# Altium PCB WRTNode2P_Botton-Board.PcbDoc
Units mil, origin at the board's own origin, x right, y up, seen from the top; angles counter-clockwise.
Board outline 2380 x 2040 mil, 2 copper layers (Top Layer, Bottom Layer); 90 components, 82 nets, 378 pads, 2 vias.
Unrouted connection lines stored in the file: 212.
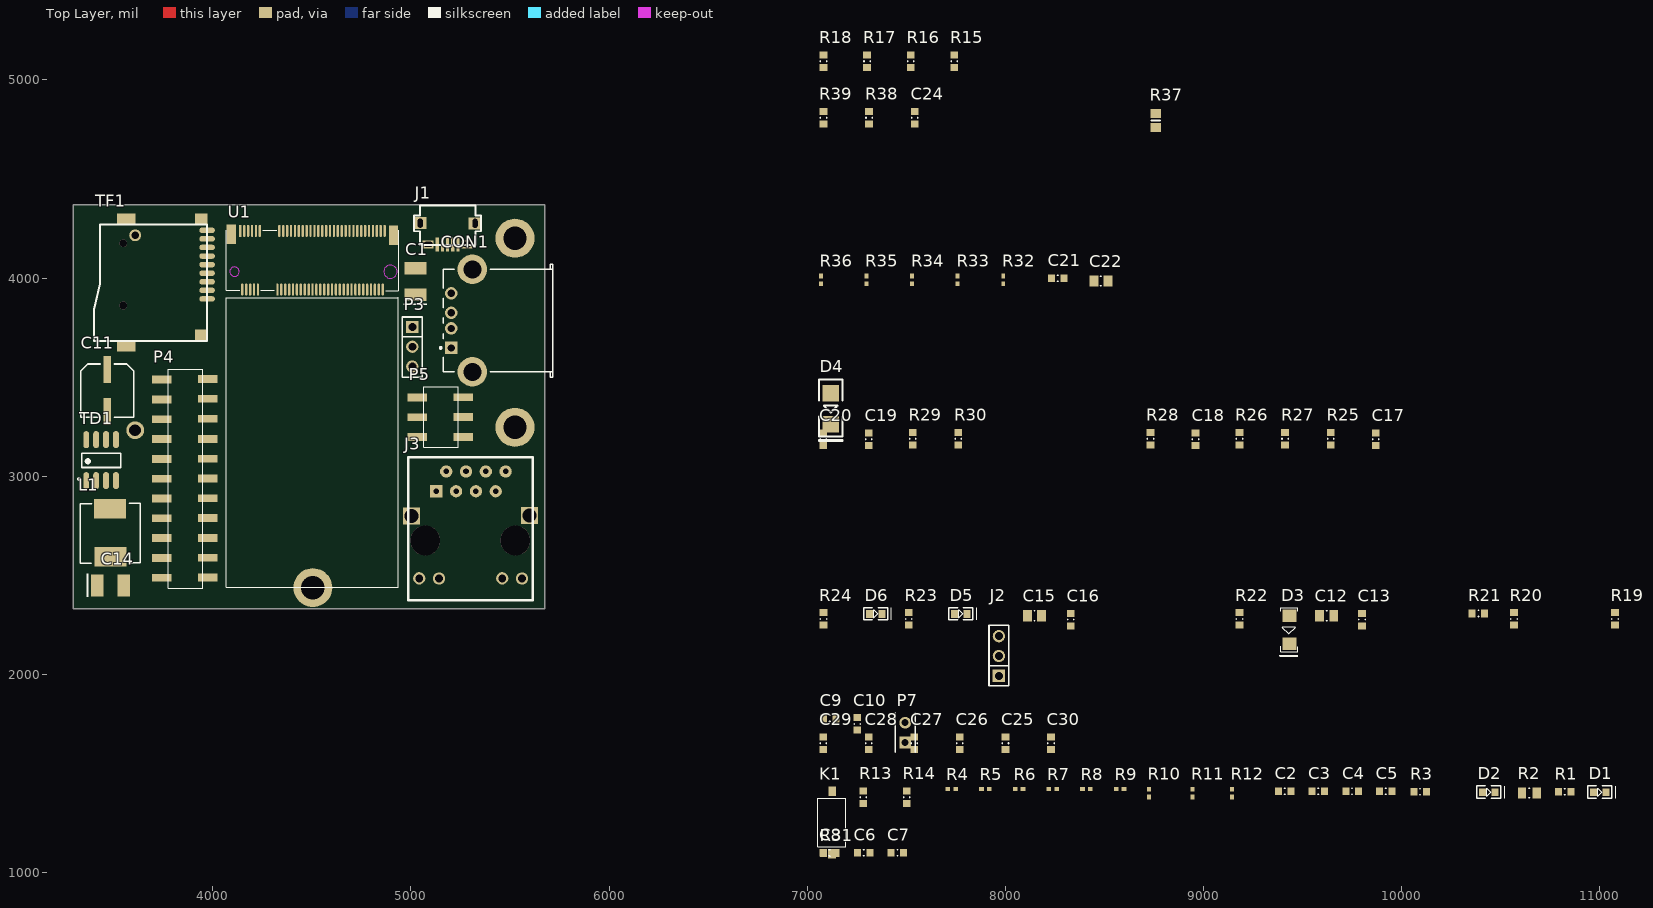
[diagram p0: Top Layer view]
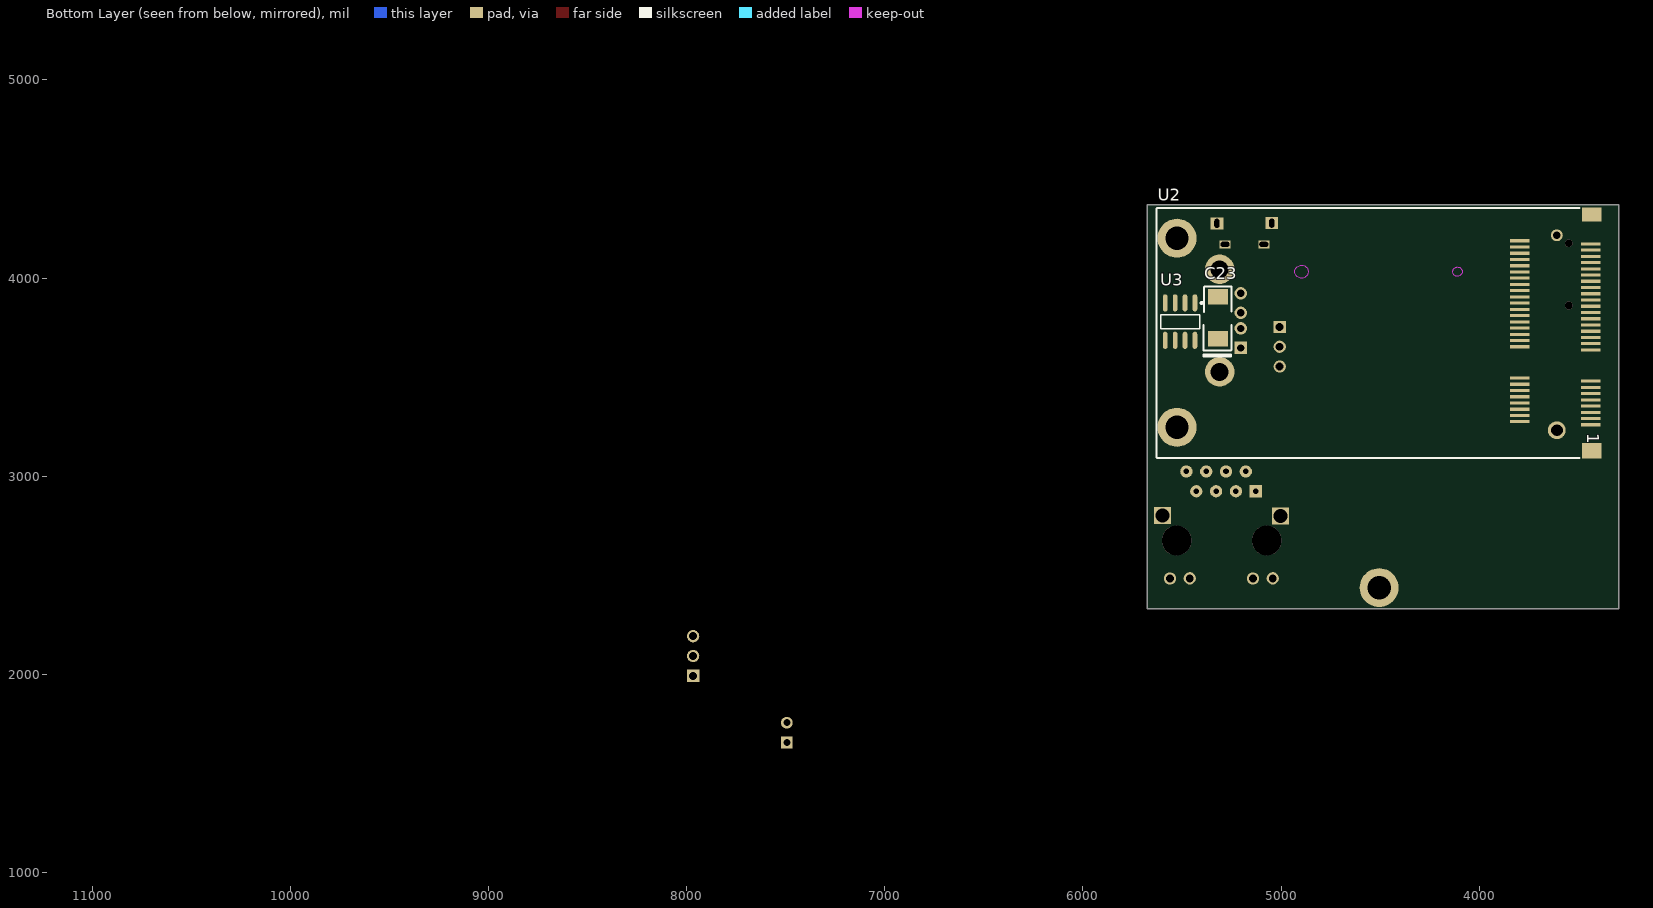
[diagram p1: Bottom Layer view, seen from below]

## Layer stack, top to bottom
Top Solder: solder mask 0.4, Solder Resist, Dk 3.5
Top Layer: signal copper 1.4
Dielectric 1: dielectric 12.6, FR-4, Dk 4.8
Bottom Layer: signal copper 1.4
Bottom Solder: solder mask 0.4, Solder Resist, Dk 3.5

## Board outline
5675,2330 3295,2330 3295,4370 5675,4370

## Design rules (kind name [scope] priority, off if disabled: settings)
Clearance [All] p1: gap=6
PolygonConnect [All] p1: connectstyle=Relief reliefconductorwidth=10 reliefentries=4 polygonreliefangle="90 Angle" airgapwidth=10
RoomDefinition Designator_5 [InComponentClass('Designator')] p1: confinementstyle=ConfineIn formatcopy=TRUE lockcomponents=FALSE outline 0,0 2000,0 2000,1000 0,1000
RoomDefinition Designator_4 [InComponentClass('Designator')] p2: confinementstyle=ConfineIn formatcopy=TRUE lockcomponents=FALSE outline 0,0 2000,0 2000,1000 0,1000
RoomDefinition Designator_3 [InComponentClass('Designator')] p3: confinementstyle=ConfineIn formatcopy=TRUE lockcomponents=FALSE outline 0,0 2000,0 2000,1000 0,1000
RoomDefinition Designator_2 [InComponentClass('Designator')] p4: confinementstyle=ConfineIn formatcopy=TRUE lockcomponents=FALSE outline 0,0 2000,0 2000,1000 0,1000
RoomDefinition Designator_1 [InComponentClass('Designator')] p5: confinementstyle=ConfineIn formatcopy=TRUE lockcomponents=FALSE outline 0,0 2000,0 2000,1000 0,1000
RoomDefinition Designator [InComponentClass('Designator')] p6: confinementstyle=ConfineIn formatcopy=TRUE lockcomponents=FALSE outline 0,0 2000,0 2000,1000 0,1000
RoomDefinition Main [InComponentClass('Main')] p7: confinementstyle=ConfineIn formatcopy=TRUE lockcomponents=FALSE outline 7045,5025 7890,5025 7890,5260 7045,5260
RoutingVias [All] p1: holewidth=28 width=50 viastyle="Through Hole" minholewidth=28 minwidth=50 maxholewidth=28 maxwidth=50
SolderMaskExpansion [All] p1: expansion=4
UnpouredPolygon [All] p1: allowunpoured=FALSE
Width [All] p1: maxlimit=100 minlimit=2 preferedwidth=8
29 further rules are at their usual default settings.

## Classes and differential pairs
component class Main: C25 C26 C27 C28 C29 C30 R15 R16 R17 R18
component class Designator: C23 C24 CON1 R37 R38 R39 U3

## Components (designator, comment, footprint, x,y, rotation, side; value= is the part's Value field where it differs from the comment)
C1 "Cap Pol1" C1210-A 5020,3975 r90 top
C2 "Cap" C0603N 9410,1405 r0 top
C3 "Cap" C0603N 9580,1405 r0 top
C4 "Cap" C0603N 9750,1405 r0 top
C5 "Cap" C0603N 9920,1405 r0 top
C6 "Cap" C0603N 7285,1095 r0 top
C7 "Cap" C0603N 7455,1095 r0 top
C8 "Cap" C0603N 7110,1095 r0 top
C9 "Cap" R0603N 7115,1780 r0 top
C10 "Cap" R0603N 7250,1750 r90 top
C11 "Cap Pol1" 16V220U 3460,3435 r0 top
C12 "Cap" C0805N 9625,2290 r0 top
C13 "Cap" C0603N 9805,2275 r90 top
C14 "Cap Pol1" C1210-A 3475,2450 r0 top
C15 "Cap" C0805N 8150,2290 r0 top
C16 "Cap" C0603N 8335,2275 r90 top
C17 "C0603" C0603N 9875,3185 r90 top
C18 "C0603" C0603N 8965,3185 r90 top
C19 "C0603" C0603N 7315,3185 r90 top
C20 "C0603" C0603N 7085,3185 r90 top
C21 "Cap" c0603n 8265,3995 r0 top
C22 "Cap" c0805n 8485,3980 r0 top
C23 "220uF/16V" C-6032 5315,3795 r270 bottom
C24 "100nF" R0603N 7540,4810 r90 top
C25 "Cap" C0603N 8005,1650 r90 top
C26 "Cap" C0603N 7775,1650 r90 top
C27 "Cap" C0603N 7545,1650 r90 top
C28 "Cap" C0603N 7315,1650 r90 top
C29 "Cap" C0603N 7085,1650 r90 top
C30 "Cap" C0603N 8235,1650 r90 top
CON1 "USB-CON" 1364372 5715,3785 r0 top
D1 "LED0603" LED0603 10995,1405 r0 top
D2 "LED0603" LED0603 10435,1405 r0 top
D3 "4733/05w" ZMM5V1 9430,2225 r90 top
D4 "Diode" DO-02 7110,3335 r90 top
D5 "LED0603" LED0603 7770,2305 r0 top
D6 "LED0603" LED0603 7340,2305 r0 top
J1 "Header 6H" MINIcro-USB-G 5170,4235 r180 top
J2 "Header 3" SIP3-2.54 7965,2085 r90 top
J3 "RJ-45-RH911105A" RJ-45-HR911105A 5305,2705 r180 top
K1 "Header 2" 3*6key 7130,1245 r90 top
L1 "10uH" L7.5*7.5 3480,2715 r90 top
P3 "Header 3" SIP3-2.54 5010,3660 r270 top
P4 "Header 11X2" "SIP2*11-2.54 PATCH" 3845,2805 r90 top
P5 "Header 3X2" "SIP2*3-2.54 PATCH" 5140,3300 r90 top
P7 "Head2" HDR1X2 7495,1655 r90 top
R1 "R0603" R0603n 10825,1410 r0 top
R2 "Res Semi" R0805N 10650,1405 r0 top
R3 "R0603" R0603N 10095,1410 r0 top
R4 "R0603" 0402 7730,1420 r0 top
R5 "R0603" 0402 7900,1420 r0 top
R6 "R0603" 0402 8070,1420 r0 top
R7 "R0603" 0402 8240,1420 r0 top
R8 "R0603" 0402 8410,1420 r0 top
R9 "R0603" 0402 8580,1420 r0 top
R10 "R0603" 0402 8725,1400 r90 top
R11 "R0603" 0402 8945,1400 r90 top
R12 "R0603" 0402 9145,1400 r90 top
R13 "Res Semi" R0603N 7280,1380 r90 top
R14 "Res Semi" R0603N 7500,1380 r90 top
R15 "Res Semi" r0603n 7740,5095 r90 top
R16 "Res Semi" r0603n 7520,5095 r90 top
R17 "Res Semi" r0603n 7300,5095 r90 top
R18 "Res Semi" r0603n 7080,5095 r90 top
R19 "Res Semi" R0603N 11075,2280 r90 top
R20 "Res Semi" R0603N 10565,2280 r90 top
R21 "Res Semi" R0603N 10390,2310 r0 top
R22 "Res Semi" R0603N 9180,2280 r90 top
R23 "R0603" R0603N 7510,2280 r90 top
R24 "R0603" R0603N 7080,2280 r90 top
R25 "R0603" R0603N 9640,3190 r90 top
R26 "R0603" R0603N 9180,3190 r90 top
R27 "R0603" R0603N 9410,3190 r90 top
R28 "R0603" R0603N 8730,3190 r90 top
R29 "R0603" R0603N 7530,3190 r90 top
R30 "R0603" R0603N 7760,3190 r90 top
R31 "Res Semi" R0603N 7115,1100 r0 top
R32 "Res Semi" 0402 7990,3990 r90 top
R33 "Res Semi" 0402 7760,3990 r90 top
R34 "Res Semi" 0402 7530,3990 r90 top
R35 "Res Semi" 0402 7300,3990 r90 top
R36 "Res Semi" 0402 7070,3990 r90 top
R37 "Res Semi" 6-0805_N 8760,4795 r90 top
R38 "10K" R0603N 7310,4810 r90 top
R39 "10K" R0603N 7080,4810 r90 top
TD1 "TD1410" SOP8 3420,3080 r0 top
TF1 "TF_CARD" TFP09-2-12B 3785,3990 r270 top
U1 "core" "NGFF M.2" 4490,3210 r0 top
U2 "PCI-E MINI CARD CONNECTOR" MINIPCIE 4245,3755 r180 bottom
U3 "MIC2025-1" SO8_N 5510,3780 r270 bottom

## Footprints (in the part's own frame and the unit in brackets; to place one, negate y for a bottom-side part, rotate by r counter-clockwise, add the part's x,y. Pads: shape width x height; smd on the part's side, far side on the other; paste and mask are expansions set on the pad)
3*6key [mil]
  rect 47.24x39.37 smd: 1(-151,4) 2(164,3)
  silkscreen extent -115,-65 129,77, body extent -113,-50 128,66, height 50
6-0805_N [mm] "Chip Resistor, Body 2.0x1.2mm, IPC Medium Density"
  rect 1.2x1.4 smd: 1(-0.9,0) 2(0.9,0)
  silkscreen extent 0,-0.6 0,0.6, body extent -1.07,-0.7 1.07,0.7, height 0.7
16V220U [mm]
  rect 1x3.5 smd: 1(0.178,2.624) 2(0.178,-2.776)
  silkscreen extent -3.22,-3.48 3.58,3.32, body extent -2.95,-3.22 3.33,3.07, height 6.1
0402 [mm] "Chip Capacitor, Body 1.0x0.5mm, IPC High Density"
  rect 0.6x0.5 smd: 1(-0.5,0) 2(0.5,0)
  body extent -0.55,-0.3 0.55,0.3, height 1.3
1364372 [mm] "Connector; USB1.1, Type A, Thru-Hole; 4 Position; Right Angle"
  rect 1.6x1.6 hole 0.92: 1(-12.99,-3.5)
  round 1.6 hole 0.92: 2(-12.99,-1) 3(-12.99,1) 4(-12.99,3.5)
  round 3.8 hole 2.3: 5(-10.28,6.57) 6(-10.28,-6.57)
  silkscreen extent -14.46,-7.25 0,7.25
C0603N [mm]
  rect 0.9x1 smd: 1(-0.775,0.102) 2(0.825,0.102)
  silkscreen extent -0.02,-0.3 0.08,0.5, body extent -0.85,-0.37 0.9,0.58, height 0.55
c0603n [mm]
  rect 0.9x1 smd: 1(-0.775,0.102) 2(0.825,0.102)
  silkscreen extent -0.02,-0.3 0.08,0.5, body extent -0.85,-0.37 0.9,0.58, height 0.55
C0805N [mm]
  rect 1.15x1.45 smd: 1(-0.951,0.127) 2(0.849,0.127)
  silkscreen extent -0.1,-0.5 0,0.75, body extent -1.15,-0.6 1.05,0.85, height 0.75
c0805n [mm]
  rect 1.15x1.45 smd: 1(-0.951,0.127) 2(0.849,0.127)
  silkscreen extent -0.1,-0.5 0,0.75, body extent -1.15,-0.6 1.05,0.85, height 0.75
C1210-A [mm]
  rect 1.6x2.8 smd: 1(-1.486,-0.076) 2(1.914,-0.076)
  silkscreen extent -2.74,-1.52 -2.64,1.42, body extent -1.91,-0.97 2.3,0.83, height 0.75
C-6032 [mm]
  rect 2x2.55 smd: 1(2.598,-0.096) 2(-2.802,-0.096)
  silkscreen extent -4.14,-1.96 4.85,1.63, body extent -2.41,-1.4 2.34,1.22, height 2.1
DO-02 [mm]
  rect 2.1x2.1 smd: 1(2.118,-0.229) 2(-1.882,-0.229)
  silkscreen extent -4.04,-1.75 3.89,1.3, body extent -2.5,-1.63 2.7,1.27, height 2.1
HDR1X2 [mm] "Connector; Header; 2 Position"
  rect 1.5x1.5 hole 0.9: 1(0,0)
  round 1.5 hole 0.9: 2(2.54,0)
  silkscreen extent -1.27,-1.27 3.81,1.27
L7.5*7.5 [mil]
  rect 98.43x161.42 smd: 1(119,-1) 2(-121,-4)
  silkscreen extent -156,-154 149,149, body extent -156,-159 152,150, height 197
LED0603 [mm]
  rect 0.9x1 smd: 1(-0.648,-0.025) 2(0.952,-0.025)
  silkscreen extent -1.4,-0.79 2.18,0.79, body extent -0.72,-0.5 1.03,0.45, height 1.1
MINIcro-USB-G [mil]
  rect 16x70 smd: 1(-67,65) 2(-41,65) 3(-15,65) 4(11,65) 5(37,65)
  rect 55x40 hole 25 slot 45 at 0 deg unplated: 6(83,65) 7(-113,65)
  rect 65x61 hole 25 slot 45 at 90 deg unplated: 8(123,-42) 9(-154,-41)
  silkscreen extent -185,-131 155,69
MINIPCIE [mm]
  round 2.286 hole 1.524 unplated: 0(16.177,-13.298)
  round 1.524 hole 0.991 unplated: 0(16.177,11.702)
  rect 2.5x0.4 smd: 1(20.527,-12.598) 2(11.427,-12.198) 3(20.527,-11.798) 4(11.427,-11.398) 5(20.527,-10.998) 6(11.427,-10.598) 7(20.527,-10.198) 8(11.427,-9.798) 9(20.527,-9.398) 10(11.427,-8.998) 11(20.527,-8.598) 12(11.427,-8.198) 13(20.527,-7.798) 14(11.427,-7.398) 15(20.527,-6.998) 16(11.427,-6.598) 17(20.527,-2.998) 18(11.427,-2.598) 19(20.527,-2.198) 20(11.427,-1.798) 21(20.527,-1.398) 22(11.427,-0.998) 23(20.527,-0.598) 24(11.427,-0.198) 25(20.527,0.202) 26(11.427,0.602) 27(20.527,1.002) 28(11.427,1.402) 29(20.527,1.802) 30(11.427,2.202) 31(20.527,2.602) 32(11.427,3.002) 33(20.527,3.402) 34(11.427,3.802) 35(20.527,4.202) 36(11.427,4.602) 37(20.527,5.002) 38(11.427,5.402) 39(20.527,5.802) 40(11.427,6.202) 41(20.527,6.602) 42(11.427,7.002) 43(20.527,7.402) 44(11.427,7.802) 45(20.527,8.202) 46(11.427,8.602) 47(20.527,9.002) 48(11.427,9.402) 49(20.527,9.802) 50(11.427,10.202) 51(20.527,10.602) 52(11.427,11.002)
  round 5 hole 3: 53(-32.523,11.322) 54(-32.523,-12.914)
  rect 2.5x1.8 smd: 55(20.677,14.352)
  rect 2.5x2 smd: 56(20.677,-15.948)
  silkscreen extent -35.13,-16.83 19.09,15.17
"NGFF M.2" [mm]
  rect 1.2x2.5 smd: 0(-10.058,25.654) 0(10.719,25.552)
  round 5 hole 3: 0(0.381,-19.634)
  rect 0.3x1.55 smd: 1(-8.915,26.111)
  oval 0.3x1.55 smd: 2(-8.661,18.587) 3(-8.415,26.111) 4(-8.161,18.587) 5(-7.915,26.111) 6(-7.661,18.587) 7(-7.415,26.111) 8(-7.161,18.587) 9(-6.915,26.111) 10(-6.661,18.587) 11(-6.415,26.111) 20(-4.161,18.587) 21(-3.915,26.111) 22(-3.661,18.587) 23(-3.415,26.111) 24(-3.161,18.587) 25(-2.915,26.111) 26(-2.661,18.587) 27(-2.415,26.111) 28(-2.161,18.587) 29(-1.915,26.111) 30(-1.661,18.587) 31(-1.415,26.111) 32(-1.161,18.587) 33(-0.915,26.111) 34(-0.661,18.587) 35(-0.415,26.111) 36(-0.161,18.587) 37(0.085,26.111) 38(0.339,18.587) 39(0.585,26.111) 40(0.839,18.587) 41(1.085,26.111) 42(1.339,18.587) 43(1.585,26.111) 44(1.839,18.587) 45(2.085,26.111) 46(2.339,18.587) 47(2.585,26.111) 48(2.839,18.587) 49(3.085,26.111) 50(3.339,18.587) 51(3.585,26.111) 52(3.839,18.587) 53(4.085,26.111) 54(4.339,18.587) 55(4.585,26.111) 56(4.839,18.587) 57(5.085,26.111) 58(5.339,18.587) 59(5.585,26.111) 60(5.839,18.587) 61(6.085,26.111) 62(6.339,18.587) 63(6.585,26.111) 64(6.839,18.587) 65(7.085,26.111) 66(7.339,18.587) 67(7.585,26.111) 68(7.839,18.587) 69(8.085,26.111) 70(8.339,18.587) 71(8.585,26.111) 72(8.839,18.587) 73(9.085,26.111) 74(9.339,18.587) 75(9.585,26.111)
  Keep-Out Layer circle w0.127: c-9.668,20.879 r0.6
  Keep-Out Layer circle w0.127: c10.334,20.879 r0.85
  silkscreen extent -10.74,-19.61 11.38,26.22
R0603N [mm]
  rect 0.9x1 smd: 1(-0.825,-0.076) 2(0.775,-0.076)
  silkscreen extent -0.08,-0.48 0.02,0.32, body extent -0.87,-0.55 0.82,0.4, height 0.6
R0603n [mm]
  rect 0.9x1 smd: 1(-0.825,-0.076) 2(0.775,-0.076)
  silkscreen extent -0.08,-0.48 0.02,0.32, body extent -0.87,-0.55 0.82,0.4, height 0.6
r0603n [mm]
  rect 0.9x1 smd: 1(-0.825,-0.076) 2(0.775,-0.076)
  silkscreen extent -0.08,-0.48 0.02,0.32, body extent -0.87,-0.55 0.82,0.4, height 0.6
R0805N [mm]
  rect 1.05x1.4 smd: 1(-1.052,-0.102) 2(0.848,-0.102)
  silkscreen extent -0.15,-0.7 -0.05,0.5, body extent -1.2,-0.78 1,0.57, height 0.7
RJ-45-HR911105A [mil]
  rect 86.61x86.61 hole 70.87: 0(-293,-96) 0(302,-94)
  round 149.61 hole 149.61: 0(-222,30) 0(233,30)
  rect 62x62 hole 28: 1(176.89,-218.37)
  round 62 hole 28: 2(126.89,-318.37) 3(76.89,-218.37) 4(26.89,-318.37) 5(-23.11,-218.37) 6(-73.11,-318.37) 7(-123.11,-218.37) 8(-173.11,-318.37)
  round 62 hole 40: 9(263,221) 10(163,222) 11(-156,221) 12(-256,222)
  silkscreen extent -310,-391 319,332, body extent -302,-387 304,349, height 550
"SIP2*3-2.54 PATCH" [mm]
  rect 1x2.5 smd: 1(-2.591,-3.145) 2(-2.616,2.718) 3(-0.051,-3.145) 4(-0.076,2.718) 5(2.489,-3.145) 6(2.464,2.718)
  silkscreen extent -3.94,-2.49 3.81,1.88, body extent -3.94,-2.54 3.81,1.91, height 8.3
"SIP2*11-2.54 PATCH" [mm]
  rect 1x2.5 smd: 1(-8.052,-3.272) 2(-8.077,2.591) 3(-5.512,-3.272) 4(-5.537,2.591) 5(-2.972,-3.272) 6(-2.997,2.591) 7(-0.432,-3.272) 8(-0.457,2.591) 9(2.108,-3.272) 10(2.083,2.591) 11(4.648,-3.272) 12(4.623,2.591) 13(7.188,-3.272) 14(7.163,2.591) 15(9.728,-3.272) 16(9.703,2.591) 17(12.319,-3.272) 18(12.243,2.591) 19(14.859,-3.272) 20(14.783,2.591) 21(17.399,-3.272) 22(17.323,2.591)
  silkscreen extent -9.4,-2.62 18.67,1.75, body extent -9.4,-2.69 18.67,1.73, height 8.3
SIP3-2.54 [mil]
  rect 62x62 hole 40: 1(-93,-3)
  round 62 hole 40: 2(7,-3) 3(107,-3)
  silkscreen extent -143,-53 162,47
SO8_N [mm] "SOIC, 8-Leads, Body 4.9x3.9mm, Pitch 1.27mm, IPC Medium Density"
  oval 2.2x0.6 smd: 1(-2.4,1.905) 2(-2.4,0.635) 3(-2.4,-0.635) 4(-2.4,-1.905) 5(2.4,-1.905) 6(2.4,-0.635) 7(2.4,0.635) 8(2.4,1.905)
  silkscreen extent -2.52,-2.5 0.9,2.88, body extent -2,-2.5 2,2.5, height 1.75
SOP8 [mil]
  oval 29.53x86.61 smd: 1(-59,-103) 2(-9,-103) 3(41,-103) 4(91,-103) 5(91,104) 6(41,104) 7(-9,104) 8(-59,104)
  silkscreen extent -100,-100 114,36, body extent -82,-79 114,79, height 69
TFP09-2-12B [mm]
  oval 0.7x2 smd: 1(2.429,4.724) 2(1.329,4.724) 3(0.229,4.724) 4(-0.871,4.724) 5(-1.971,4.724) 6(-3.071,4.724) 7(-4.171,4.724) 8(-5.271,4.724) 9(-6.371,4.724)
  rect 1.4x1.6 smd: 10(7.079,3.97) 11(-7.825,3.97)
  rect 1.4x2.4 smd: 12(8.487,-5.63) 13(-7.825,-5.63)
  silkscreen extent -7.14,-9.75 7.85,4.72
ZMM5V1 [mil]
  rect 62.99x70.87 smd: 1(69,-5) 2(-71,-4)
  silkscreen extent -135,-48 111,44, body extent -84,-40 81,31, height 30

## Part data
C1 C11 C14: "Polarized Capacitor (Radial)"
C2 C3 C4 C5 C6 C7 C8 C9 C10 C12 C13 C15 C16 C21 C22 C25 C26 C27 C28 C29 C30: "Capacitor"
C17 C18 C19 C20: library part "Cap Semi", "Capacitor (Semiconductor SIM Model)"
C23: library part "Cap Pol1", "Polarized Capacitor (Radial)"
C24: library part CAP
D1 D2 D5 D6: library part LED, "LED"
D3: library part Diode, "Default Diode"
D4: "Default Diode"
J1: "Header, 6-Pin, Right Angle"
J2 P3: "Header, 3-Pin"
K1: "Header, 2-Pin"
L1: library part Inductor, "Inductor"
P4: "Header, 11-Pin, Dual row"
P5: "Header, 3-Pin, Dual row"
R1 R3 R4 R5 R6 R7 R8 R9 R10 R11 R12 R23 R24 R25 R26 R27 R28 R29 R30: library part "Res Semi", "Semiconductor Resistor"
R2 R13 R14 R15 R16 R17 R18 R19 R20 R21 R22 R31 R32 R33 R34 R35 R36 R37: "Semiconductor Resistor"
R38 R39: library part RES

## Via types
v1: diameter 39.37, hole 39.37, Top Layer to Bottom Layer, 2 vias

## Nets (pads, with @x,y where several pads share a name; then routed paths per layer and width w, separated by ;. In a path a pad name is that pad's centre, name@x,y a point inside that pad or via, vN(x,y) a via of type N, cw(c..) or ccw(c..) an arc to the next point about the centre after c; other vN are vias at no path point)
+1.5V: C8.2 C9.2 C10.2 P7.1 U2.6 U2.28 U2.48
C_5V: C23.1 C24.2 CON1.1 R37.2 U3.6 U3.8
D0: R35.2 TF1.7 U1.35
D1: R36.2 TF1.8 U1.37
D2: R32.2 TF1.1 U1.31
D3: R33.2 TF1.2 U1.29
DGND: C6.1 C7.1 C8.1 C9.1 C10.1 C11.2 C12.1 C13.1 C14.2 C15.1 C16.1 C17.2 C18.2 C19.1 C20.1 C21.2 C22.2 C23.2 C24.1 CON1.4 D3.1 D4.1 D5.2 D6.2 J1.5 J1.6 J2.3 J3.8 K1.1 P5.5 P5.6 P7.2 R16.1 R18.2 R21.2 R22.1 R38.2 TD1.4 TF1.6 TF1.10 TF1.11 TF1.12 TF1.13 U1.3 U1.5 U1.11 U1.27 U1.33 U1.39 U1.45 U1.51 U1.57 U1.71 U1.73 U2.4 U2.9 U2.15 U2.18 U2.21 U2.26 U2.27 U2.29 U2.34 U2.35 U2.37 U2.40 U2.43 U2.50 U3.3
DM1: CON1.2 U1.9
DP1: CON1.3 U1.7
GPIO0: P4.21 U1.48
I2C_CLK: P4.12 R9.1 U1.66
I2C_SDA: K1.2 P4.10 R8.1 U1.65
I2S_CLK: P4.18 R11.1 U1.67
I2S_SDI: P4.20 R12.1 U1.75
I2S_SDO: P4.16 R10.1 U1.69
I2S_WS: P4.14 U1.68
LINK0: U1.10 U2.42
LINK1: R17.1 U1.20
LINK2: D2.2 P4.17 U1.21
LINK3: U1.22 U2.44
LINK4: P4.19 U1.23
NetC1_2: C1.2 C2.1 C3.1 C4.1 C5.1
NetC17_1: C17.1 R26.2 R27.2
NetC18_1: C18.1 J3.4 R25.1 R28.1
NetC19_2: C19.2 J3.5
NetC20_2: C20.2 R29.1 R30.1
NetC25_1: C25.1 U2.11
NetC26_1: C26.1 U2.25
NetC27_1: C27.1 U2.23
NetC28_1: C28.1 U2.33
NetC29_1: C29.1 U2.31
NetC30_1: C30.1 U2.13
NetD1_1: D1.1 R1.2
NetD2_1: D2.1 R3.2
NetD4_2: D4.2 L1.1 TD1.3
NetD5_1: D5.1 R23.2
NetD6_1: D6.1 R24.2
NetP3_2: P3.2 R13.2 R14.1 U1.1
NetR15_2: R15.2 R16.2 U2.22
NetR17_2: R17.2 R18.1 U2.20
NetR19_1: R19.1 R21.1 TD1.7
NetR20_2: R20.2 R22.2 TD1.5
PCIE_CKN: C25.2 U1.53
PCIE_CKP: C30.2 U1.55
PCIE_RXN: C27.2 U1.47
PCIE_RXP: C26.2 U1.49
PCIE_TXN: C29.2 U1.41
PCIE_TXP: C28.2 U1.43
PERSTN: R15.1 U1.50
REF_CLK0: P4.22 U1.25
RXIN0: J3.2 R26.1 U1.26
RXIN1: P4.9 U1.52
RXIN2: P4.5 U1.44
RXIN4: R34.2 TF1.3 U1.32
RXIP0: J3.1 R27.1 U1.24
RXIP1: P4.11 U1.54
RXIP2: P4.7 U1.46
RXIP4: TF1.5 U1.34
SPI_CLK: P4.4 R5.1 U1.63
SPI_CS1: P4.8 R7.1 U1.64
SPI_MISO: P4.6 R6.1 U1.62
SPI_MOSI: P4.2 R4.1 U1.61
TF_INT: R31.2 TF1.9 U1.36
TXON0: J3.6 R29.2 U1.30
TXON1: P4.13 U1.56
TXON2: P4.1 U1.40
TXOP0: J3.3 R30.2 U1.28
TXOP1: P4.15 U1.58
TXOP2: P4.3 U1.42
TXOP3: U1.38
UART0_RX: P5.1 U1.59
UART0_TX: P5.3 U1.60
UART1_RX: P3.3 P5.2 R13.1
UART1_TX: P5.4 U1.6
USB_OVERCUR: R39.1 U3.2
USB_PWREN: R38.1 U3.1
V3.3: C6.2 C7.2 R39.2 U2.2 U2.24 U2.39 U2.41 U2.52
V3.3V: C1.1 C2.2 C3.2 C4.2 C5.2 R2.2 R4.2 R5.2 R6.2 R7.2 R8.2 R9.2 R10.2 R11.2 R12.2 U1.2 U1.4 U1.70 U1.72 U1.74
VCC2V: P3.1 R14.2 R28.2
VCC3V3: C14.1 C15.2 C16.2 C21.1 C22.1 J2.2 L1.2 R1.1 R2.1 R3.1 R20.1 R24.1 R25.2 R31.1 R32.1 R33.1 R34.1 R35.1 R36.1 TF1.4
VCC5V: C11.1 C12.2 C13.2 D3.2 J1.1 J2.1 R19.2 R23.1 R37.1 TD1.2 U3.7
WLED: D1.2 U1.8
pads on no net: CON1.5 CON1.6 J1.2 J1.3 J1.4 J1.7 J1.8 J1.9 J3.0 J3.7 J3.9 J3.10 J3.11 J3.12 TD1.1 TD1.6 TD1.8 U1.0 U2.0 U2.1 U2.3 U2.5 U2.7 U2.8 U2.10 U2.12 U2.14 U2.16 U2.17 U2.19 U2.30 U2.32 U2.36 U2.38 U2.45 U2.46 U2.47 U2.49 U2.51 U2.53 U2.54 U2.55 U2.56 U3.4 U3.5
copper on no net:
  other v1: 3547.61,3860.92 3547.61,4175.09

## Text inside footprints (layer, text, board x,y; h text height)
U2: Bottom Overlay "1" at 3453.34,3215.7 h60 r90